# Altium PCB main_old.PcbDoc (part 8 of 15)
Units mil, origin at the board's own origin, x right, y up, seen from the top; angles counter-clockwise.
Board outline 8394.55 x 5164.44 mil, 7 copper layers (Top Layer 1, Layer 2, Layer 3, Unused, Layer 4_pow, Layer 5_gnd, Bottom 6+gnd), stack 46.112 mil thick; 363 components, 409 nets, 1750 pads, 991 vias.
Unrouted connection lines stored in the file: 1.
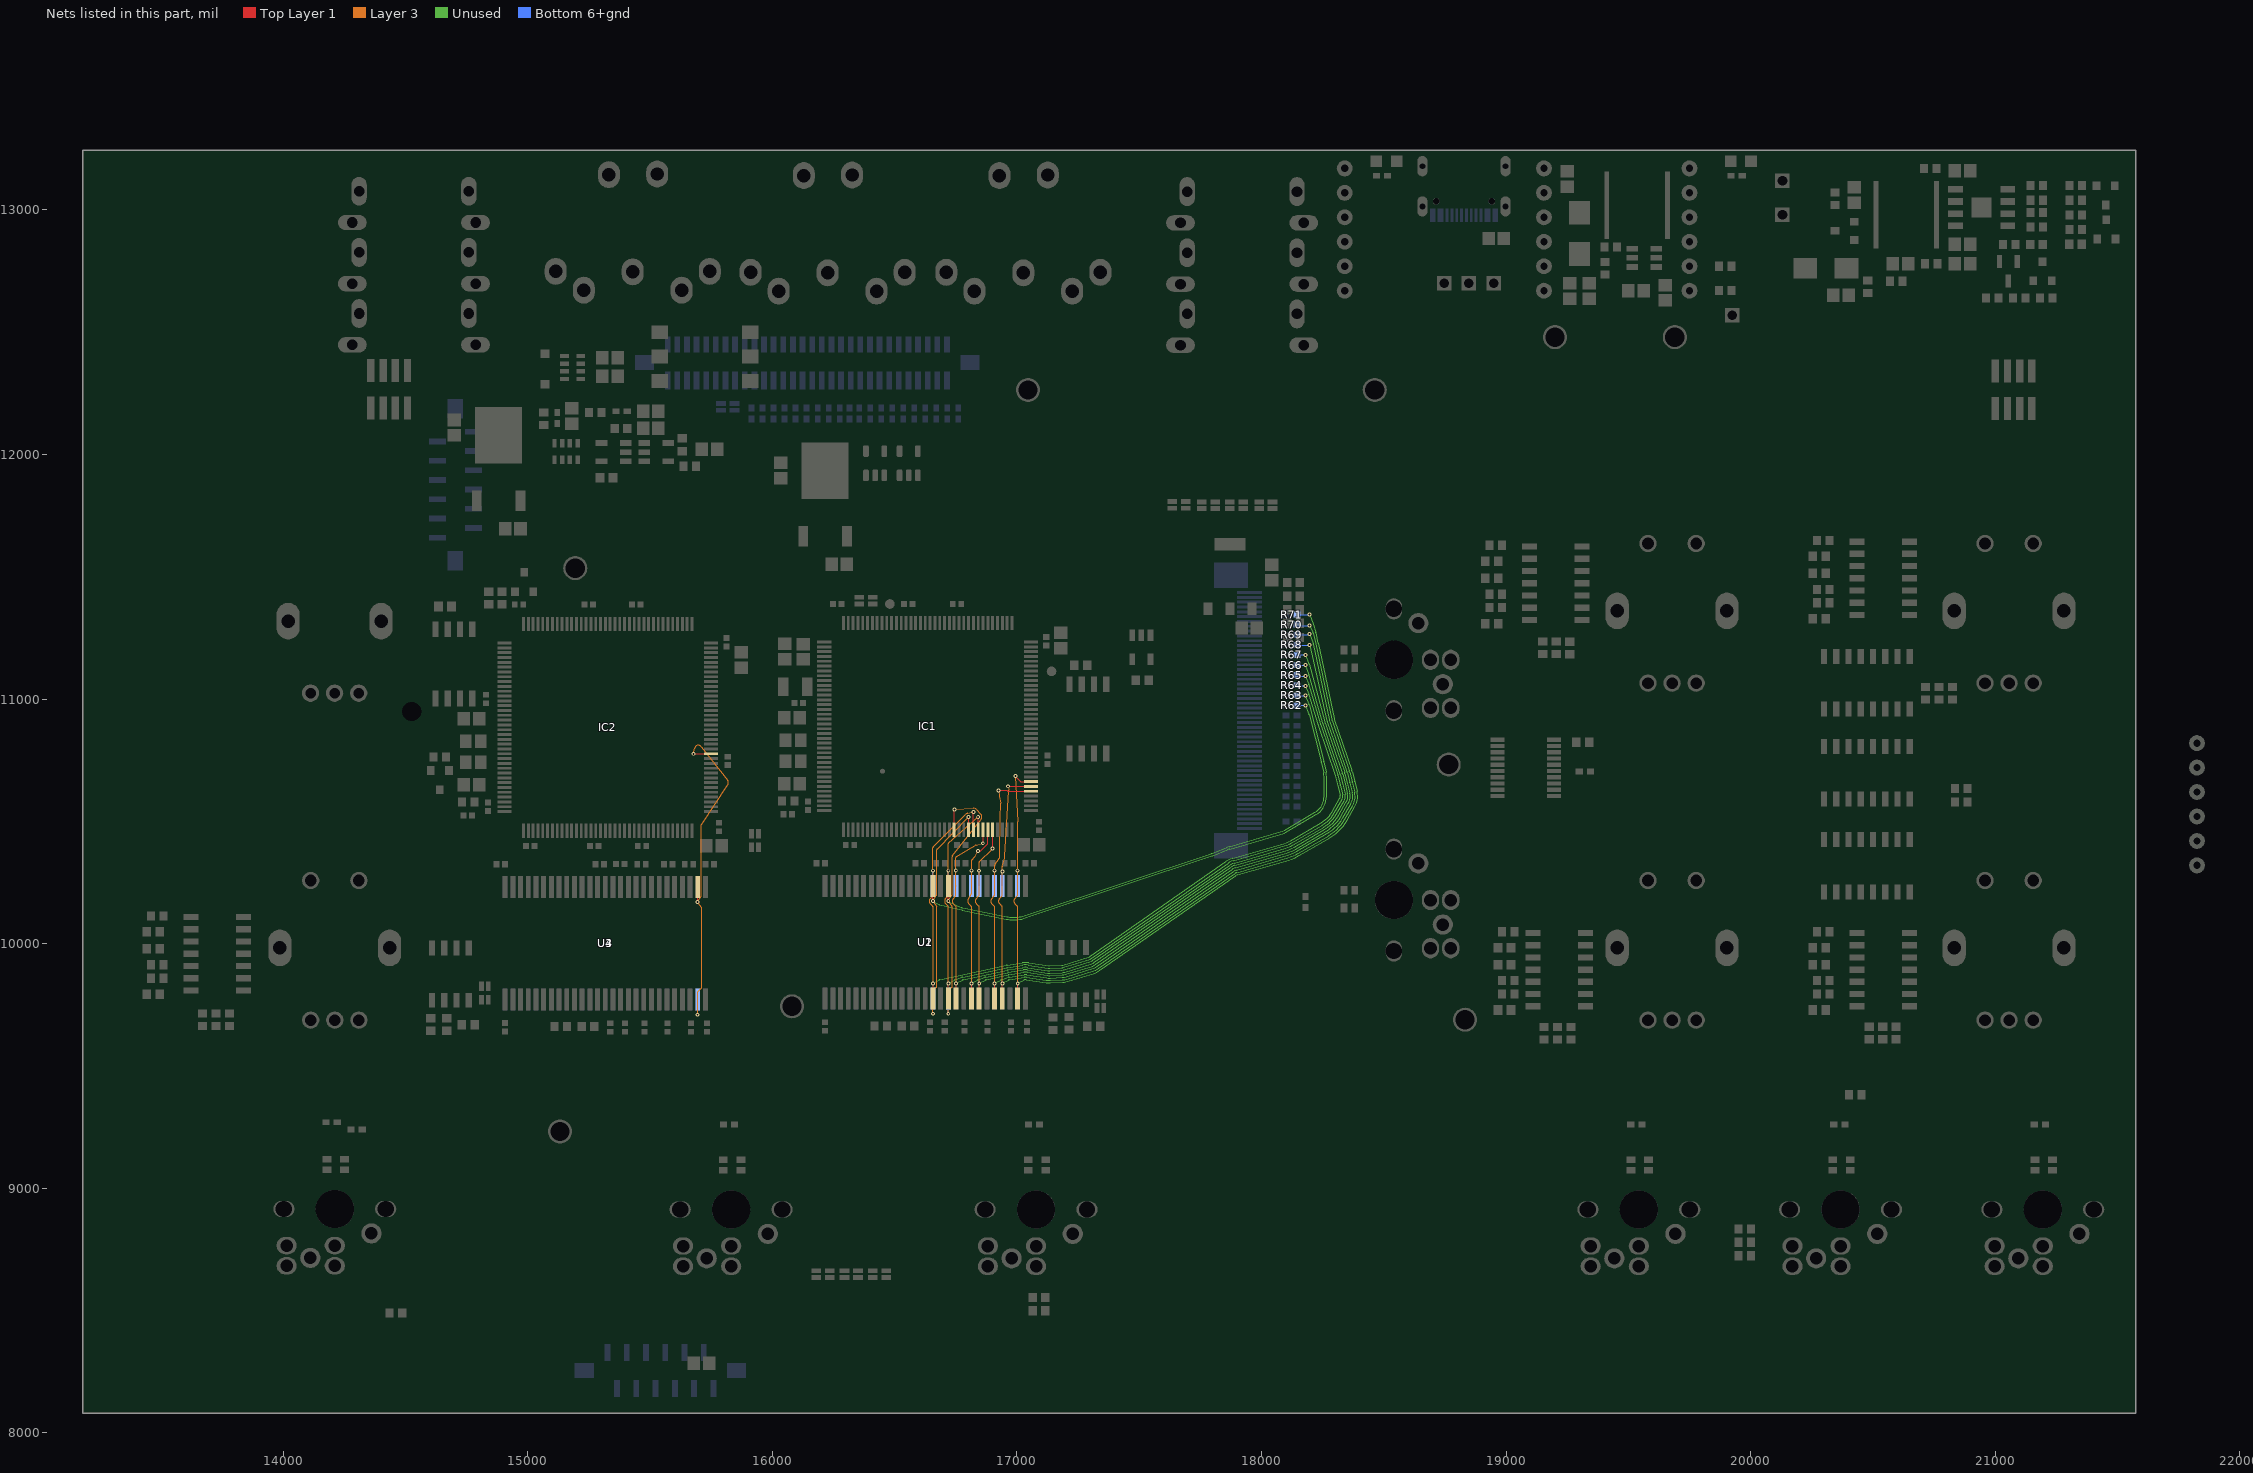
[diagram p11: the nets of this part, all layers, seen from the top]

## Via types
v1: diameter 15.75, hole 7.87, Top Layer 1 to Bottom 6+gnd, tented both sides, 923 vias
v2: diameter 27.56, hole 11.81, Top Layer 1 to Bottom 6+gnd, 45 vias
v3: diameter 23.62/23.62/23.62/23.62/23.62/23.62/23.62 (per signal layer), hole 12, Top Layer 1 to Bottom 6+gnd, tented top, 10 vias
v4: diameter 15.75, hole 7.87, Top Layer 1 to Bottom 6+gnd, 10 vias
v5: diameter 23.62/23.62/23.62/23.62/23.62/23.62/23.62 (per signal layer), hole 12, Top Layer 1 to Bottom 6+gnd, tented bottom, 3 vias

## Nets (pads, with @x,y where several pads share a name; then routed paths per layer and width w, separated by ;. In a path a pad name is that pad's centre, name@x,y a point inside that pad or via, vN(x,y) a via of type N, cw(c..) or ccw(c..) an arc to the next point about the centre after c; other vN are vias at no path point) (continued)
D6: IC1.60 R62.2 U1.11 U2.11 | length 3636.5
  Top Layer 1 w5: v1(16719.24,10174.13) 16719.24,10193.72 U1.11@16719.49,10236.22 ; IC1.60@16743.43,10465.91 16744.13,10466.61 16744.13,10547.95 v1(16745,10548.82)
  Unused w5: v1(16719.24,10174.13) 16720.82,10172.64 ccw(c16724.24,10176.28) 16721.93,10171.85 16743.62,10160.51 ccw(c16750.74,10174.13) 16744.97,10159.88 16773.04,10148.61 ccw(c16782.5,10172.15) 16777.38,10147.3 16958.03,10110.1 ccw(c16971.21,10174.13) 16971.21,10108.76 17002.71,10108.76 ccw(c17002.71,10174.13) 17024.23,10112.4 17059.75,10124.76 cw(c17068.11,10100.81) 17060.13,10124.89 17793.61,10367.97 ccw(c17770.06,10439.17) 17797.64,10369.43 17855.63,10392.32 cw(c17906.89,10262.58) 17868.12,10396.58 18076.76,10456.95 ccw(c18056.25,10529.09) 18094.04,10464.3 18218.41,10536.89 ccw(c18180.42,10601.98) 18255.79,10601.98 18255.79,10681.98 ccw(c18180.42,10681.98) 18253.9,10698.76 18244.18,10741.43 ccw(c18180.42,10726.98) 18243.74,10743.24 18194.2,10936.27 ccw(c18179.31,10932.45) 18193.59,10938.14 v1(18179.31,10974.03)
  Layer 3 w5: v1(16719.24,9713.5) 16719.24,9805.11 cw(c16724.24,9805.12) 16720.69,9808.63 16733.91,9821.89 ; v1(16745,10548.82) 16821.06,10553.92 ; 16733.91,9821.89 ccw(c16730.36,9825.42) 16735.36,9825.33 ; 16733.91,9821.89 ccw(c16730.36,9825.42) 16735.36,9825.33 ; 16733.91,9821.89 ccw(c16730.36,9825.42) 16735.36,9825.33 ; 16733.91,9821.89 ccw(c16730.36,9825.42) 16735.36,9825.33 ; 16733.91,9821.89 ccw(c16730.36,9825.42) 16735.36,9825.33 ; 16733.91,9821.89 ccw(c16730.36,9825.42) 16735.36,9825.33 ; 16733.91,9821.89 ccw(c16730.36,9825.42) 16735.36,9825.33 ; 16733.91,9821.89 ccw(c16730.36,9825.42) 16735.36,9825.33 ; 16733.91,9821.89 ccw(c16730.36,9825.42) 16735.36,9825.33 ; 16733.91,9821.89 ccw(c16730.36,9825.42) 16735.36,9825.33 ; 16733.91,9821.89 ccw(c16730.36,9825.42) 16735.36,9825.33 ; 16733.91,9821.89 ccw(c16730.36,9825.42) 16735.36,9825.33 ; 16733.91,9821.89 ccw(c16730.36,9825.42) 16735.36,9825.33 ; 16733.91,9821.89 ccw(c16730.36,9825.42) 16735.36,9825.33 ; 16733.91,9821.89 ccw(c16730.36,9825.42) 16735.36,9825.33 ; 16733.91,9821.89 ccw(c16730.36,9825.42) 16735.36,9825.33 ; 16734.32,10152.99 cw(c16730.36,10149.93) 16735.36,10150.02 ; 16734.32,10152.99 cw(c16730.36,10149.93) 16735.36,10150.02 ; 16734.32,10152.99 cw(c16730.36,10149.93) 16735.36,10150.02 ; 16734.32,10152.99 cw(c16730.36,10149.93) 16735.36,10150.02 ; 16734.32,10152.99 cw(c16730.36,10149.93) 16735.36,10150.02 ; 16734.32,10152.99 cw(c16730.36,10149.93) 16735.36,10150.02 ; 16734.32,10152.99 cw(c16730.36,10149.93) 16735.36,10150.02 ; 16734.32,10152.99 cw(c16730.36,10149.93) 16735.36,10150.02 ; 16734.32,10152.99 cw(c16730.36,10149.93) 16735.36,10150.02 ; 16734.32,10152.99 cw(c16730.36,10149.93) 16735.36,10150.02 ; 16734.32,10152.99 cw(c16730.36,10149.93) 16735.36,10150.02 ; 16734.32,10152.99 cw(c16730.36,10149.93) 16735.36,10150.02 ; 16734.32,10152.99 cw(c16730.36,10149.93) 16735.36,10150.02 ; 16734.32,10152.99 cw(c16730.36,10149.93) 16735.36,10150.02 ; 16734.32,10152.99 cw(c16730.36,10149.93) 16735.36,10150.02 ; 16734.32,10152.99 cw(c16730.36,10149.93) 16735.36,10150.02 ; 16734.32,10152.99 16720.29,10171.06 cw(c16724.24,10174.13) v1(16719.24,10174.13) 16719.24,10174.19 cw(c16724.24,10174.13) 16720.06,10176.88 16733.8,10197.79 ccw(c16729.62,10200.53) 16734.62,10200.44 16734.62,10356.36 ; 16734.62,10356.36 cw(c16739.62,10356.36) 16735.69,10359.46 ; 16734.62,10356.36 cw(c16739.62,10356.36) 16735.69,10359.46 ; 16734.62,10356.36 cw(c16739.62,10356.36) 16735.69,10359.46 ; 16734.62,10356.36 cw(c16739.62,10356.36) 16735.69,10359.46 ; 16734.62,10356.36 cw(c16739.62,10356.36) 16735.69,10359.46 ; 16734.62,10356.36 cw(c16739.62,10356.36) 16735.69,10359.46 ; 16734.62,10356.36 cw(c16739.62,10356.36) 16735.69,10359.46 ; 16734.62,10356.36 cw(c16739.62,10356.36) 16735.69,10359.46 ; 16734.62,10356.36 cw(c16739.62,10356.36) 16735.69,10359.46 ; 16734.62,10356.36 cw(c16739.62,10356.36) 16735.69,10359.46 ; 16734.62,10356.36 cw(c16739.62,10356.36) 16735.69,10359.46 ; 16734.62,10356.36 cw(c16739.62,10356.36) 16735.69,10359.46 ; 16734.62,10356.36 cw(c16739.62,10356.36) 16735.69,10359.46 ; 16734.62,10356.36 cw(c16739.62,10356.36) 16735.69,10359.46 ; 16734.62,10356.36 cw(c16739.62,10356.36) 16735.69,10359.46 ; 16734.62,10356.36 cw(c16739.62,10356.36) 16735.69,10359.46 ; 16735.36,9825.33 16735.36,10150.02 ; 16735.69,10359.46 16853.53,10509.07 ccw(c16841.46,10518.58) 16852.5,10529.28 16833.13,10549.28 ; 16821.06,10553.92 cw(c16822.09,10538.58) 16833.13,10549.28 ; 16821.06,10553.92 cw(c16822.09,10538.58) 16833.13,10549.28 ; 16821.06,10553.92 cw(c16822.09,10538.58) 16833.13,10549.28 ; 16821.06,10553.92 cw(c16822.09,10538.58) 16833.13,10549.28 ; 16821.06,10553.92 cw(c16822.09,10538.58) 16833.13,10549.28 ; 16821.06,10553.92 cw(c16822.09,10538.58) 16833.13,10549.28 ; 16821.06,10553.92 cw(c16822.09,10538.58) 16833.13,10549.28 ; 16821.06,10553.92 cw(c16822.09,10538.58) 16833.13,10549.28 ; 16821.06,10553.92 cw(c16822.09,10538.58) 16833.13,10549.28 ; 16821.06,10553.92 cw(c16822.09,10538.58) 16833.13,10549.28 ; 16821.06,10553.92 cw(c16822.09,10538.58) 16833.13,10549.28 ; 16821.06,10553.92 cw(c16822.09,10538.58) 16833.13,10549.28 ; 16821.06,10553.92 cw(c16822.09,10538.58) 16833.13,10549.28 ; 16821.06,10553.92 cw(c16822.09,10538.58) 16833.13,10549.28 ; 16821.06,10553.92 cw(c16822.09,10538.58) 16833.13,10549.28 ; 16821.06,10553.92 cw(c16822.09,10538.58) 16833.13,10549.28
  Bottom 6+gnd w5: v1@16719.49,9713.75 U2.11@16719.49,9775.59 ; R62.2@18145.28,10974.03 v1(18179.31,10974.03)
D7: IC1.63 R63.2 U1.13 U2.13 | length 3429.1
  Top Layer 1 w5: v1(16656.25,10174.13) 16656.25,10193.72 U1.13@16656.5,10236.22 ; IC1.63@16802.32,10466.06 v1@16802.32,10518.35
  Unused w5: v1(16656.25,10174.13) 16657.74,10172.65 ccw(c16661.25,10176.21) 16658.95,10171.77 16680.7,10160.47 ccw(c16687.75,10174.13) 16684.19,10159.18 16774.38,10137.72 16775.32,10137.51 ccw(c16777.38,10147.3) 16775.41,10137.5 16956.03,10100.3 ccw(c16971.21,10174.13) 16971.21,10098.76 17002.71,10098.76 ccw(c17002.71,10174.13) 17027.48,10102.95 17063.03,10115.32 cw(c17068.11,10100.81) 17063.28,10115.4 17796.8,10358.49 ccw(c17770.06,10439.17) 17801.26,10360.11 17859.35,10383.04 cw(c17906.89,10262.58) 17870.92,10386.98 18079.54,10447.34 ccw(c18056.25,10529.09) 18099.08,10455.67 18223.45,10528.25 ccw(c18180.42,10601.98) 18265.79,10601.98 18265.79,10681.98 ccw(c18180.42,10681.98) 18263.65,10700.98 18253.92,10743.66 ; v1(18179.31,11014.03) 18193.5,10979.94 cw(c18179.31,10974.03) 18194.21,10977.83 18253.42,10745.76 cw(c18180.42,10726.98) 18253.93,10743.66
  Layer 3 w5: v1(16656.25,9713.5) 16656.25,9805.11 cw(c16661.25,9805.12) 16657.7,9808.63 16670.66,9821.64 ; v1(16802.09,10518.58) 16673.05,10386.87 ; v1@16656.25,10174.13 ccw(c16661.25,10174.13) v1@16657.28,10171.1 ; v1@16656.25,10174.13 ccw(c16661.25,10174.13) v1@16657.28,10171.1 ; v1@16656.25,10174.13 ccw(c16661.25,10174.13) v1@16657.28,10171.1 ; v1@16656.25,10174.13 ccw(c16661.25,10174.13) v1@16657.28,10171.1 ; v1@16656.25,10174.13 ccw(c16661.25,10174.13) v1@16657.28,10171.09 ; v1(16656.25,10174.13) 16656.25,10174.19 cw(c16661.25,10174.13) 16657.07,10176.88 16670.8,10197.79 ccw(c16666.62,10200.53) 16671.62,10200.44 16671.62,10383.37 ; v1@16657.28,10171.09 16671.07,10153.24 ; 16670.66,9821.64 ccw(c16667.11,9825.17) 16672.11,9825.08 ; 16670.66,9821.64 ccw(c16667.11,9825.17) 16672.11,9825.08 ; 16670.66,9821.64 ccw(c16667.11,9825.17) 16672.11,9825.08 ; 16670.66,9821.64 ccw(c16667.11,9825.17) 16672.11,9825.08 ; 16670.66,9821.64 ccw(c16667.11,9825.17) 16672.11,9825.08 ; 16670.66,9821.64 ccw(c16667.11,9825.17) 16672.11,9825.08 ; 16670.66,9821.64 ccw(c16667.11,9825.17) 16672.11,9825.08 ; 16670.66,9821.64 ccw(c16667.11,9825.17) 16672.11,9825.08 ; 16670.66,9821.64 ccw(c16667.11,9825.17) 16672.11,9825.08 ; 16670.66,9821.64 ccw(c16667.11,9825.17) 16672.11,9825.08 ; 16670.66,9821.64 ccw(c16667.11,9825.17) 16672.11,9825.08 ; 16670.66,9821.64 ccw(c16667.11,9825.17) 16672.11,9825.08 ; 16670.66,9821.64 ccw(c16667.11,9825.17) 16672.11,9825.08 ; 16670.66,9821.64 ccw(c16667.11,9825.17) 16672.11,9825.08 ; 16670.66,9821.64 ccw(c16667.11,9825.17) 16672.11,9825.08 ; 16670.66,9821.64 ccw(c16667.11,9825.17) 16672.11,9825.08 ; 16671.07,10153.24 cw(c16667.11,10150.19) 16672.11,10150.28 ; 16671.07,10153.24 cw(c16667.11,10150.19) 16672.11,10150.28 ; 16671.07,10153.24 cw(c16667.11,10150.19) 16672.11,10150.28 ; 16671.07,10153.24 cw(c16667.11,10150.19) 16672.11,10150.28 ; 16671.07,10153.24 cw(c16667.11,10150.19) 16672.11,10150.28 ; 16671.07,10153.24 cw(c16667.11,10150.19) 16672.11,10150.28 ; 16671.07,10153.24 cw(c16667.11,10150.19) 16672.11,10150.28 ; 16671.07,10153.24 cw(c16667.11,10150.19) 16672.11,10150.28 ; 16671.07,10153.24 cw(c16667.11,10150.19) 16672.11,10150.28 ; 16671.07,10153.24 cw(c16667.11,10150.19) 16672.11,10150.28 ; 16671.07,10153.24 cw(c16667.11,10150.19) 16672.11,10150.28 ; 16671.07,10153.24 cw(c16667.11,10150.19) 16672.11,10150.28 ; 16671.07,10153.24 cw(c16667.11,10150.19) 16672.11,10150.28 ; 16671.07,10153.24 cw(c16667.11,10150.19) 16672.11,10150.28 ; 16671.07,10153.24 cw(c16667.11,10150.19) 16672.11,10150.28 ; 16671.07,10153.24 cw(c16667.11,10150.19) 16672.11,10150.28 ; 16671.62,10383.37 cw(c16676.63,10383.37) 16673.04,10386.86 ; 16671.62,10383.37 cw(c16676.63,10383.37) 16673.04,10386.86 ; 16671.62,10383.37 cw(c16676.63,10383.37) 16673.05,10386.87 ; 16671.62,10383.37 cw(c16676.63,10383.37) 16673.05,10386.86 ; 16671.62,10383.37 cw(c16676.63,10383.37) 16673.04,10386.86 ; 16671.62,10383.37 cw(c16676.63,10383.37) 16673.04,10386.86 ; 16671.62,10383.37 cw(c16676.63,10383.37) 16673.04,10386.86 ; 16671.62,10383.37 cw(c16676.63,10383.37) 16673.04,10386.86 ; 16671.62,10383.37 cw(c16676.63,10383.37) 16673.04,10386.85 ; 16671.62,10383.37 cw(c16676.63,10383.37) 16673.04,10386.85 ; 16671.62,10383.37 cw(c16676.63,10383.37) 16673.04,10386.85 ; 16671.62,10383.37 cw(c16676.63,10383.37) 16673.04,10386.85 ; 16671.62,10383.37 cw(c16676.63,10383.37) 16673.04,10386.85 ; 16671.62,10383.37 cw(c16676.63,10383.37) 16673.04,10386.85 ; 16671.62,10383.37 cw(c16676.63,10383.37) 16673.04,10386.85 ; 16671.62,10383.37 cw(c16676.63,10383.37) 16673.04,10386.85 ; 16672.11,9825.08 16672.11,10150.28
  Bottom 6+gnd w5: v1@16656.5,9713.75 U2.13@16656.5,9775.59 ; R63.2@18144.17,11014.23 18179.1,11014.23 v1(18179.31,11014.03)
D8: IC1.64 R64.2 U1.42 U2.42 | length 3696.2
  Top Layer 1 w5: U1.42@16656.5,9775.59 16656.74,9818.09 v1(16656.74,9837.68) ; IC1.64@16822.17,10465.9 v1@16822.17,10538.5
  Unused w5: v1(16656.74,9837.68) 16658.21,9839.14 cw(c16661.74,9835.6) 16659.44,9840.04 16681.13,9851.31 cw(c16688.24,9837.68) 16684.98,9852.7 16955.77,9911.35 cw(c16971.7,9837.68) 16959.74,9912.09 17021.14,9921.97 cw(c17034.69,9837.68) 17047.87,9922.03 17129.61,9909.48 ccw(c17131.96,9924.67) 17132.74,9909.31 17182.9,9911.85 ccw(c17182.09,9927.2) 17186.64,9912.52 17297.1,9946.79 ccw(c17294.88,9953.96) 17299.17,9947.81 17855.69,10335.99 cw(c17906.89,10262.58) 17882.02,10348.55 18090.73,10408.94 ccw(c18056.25,10529.09) 18119.13,10421.05 18243.61,10493.7 ccw(c18180.42,10601.98) 18289.14,10539.56 18320.73,10594.57 ccw(c18307.4,10602.23) 18322.34,10605.83 18312.6,10646.2 ccw(c18297.66,10642.59) 18312.53,10646.47 18302.33,10685.68 ccw(c18287.45,10681.8) 18301.92,10686.99 18231.71,10892.03 cw(c18338.58,10928.53) 18230.33,10896.35 18194.04,11018.41 ccw(c18179.31,11014.03) 18193.5,11019.94 v1(18179.31,11054.03)
  Layer 3 w5: v1(16656.74,9837.68) 16656.74,10149.87 ; v1(16822.09,10538.58) 16798.87,10533.62 ; 16655.28,10153.31 cw(c16651.74,10149.78) 16656.74,10149.87 ; 16655.28,10153.31 cw(c16651.74,10149.78) 16656.74,10149.87 ; 16655.28,10153.31 cw(c16651.74,10149.78) 16656.74,10149.87 ; 16655.28,10153.31 cw(c16651.74,10149.78) 16656.74,10149.87 ; 16655.28,10153.31 cw(c16651.74,10149.78) 16656.74,10149.87 ; 16655.28,10153.31 cw(c16651.74,10149.78) 16656.74,10149.87 ; 16655.28,10153.31 cw(c16651.74,10149.78) 16656.74,10149.87 ; 16655.28,10153.31 cw(c16651.74,10149.78) 16656.74,10149.87 ; 16655.28,10153.31 cw(c16651.74,10149.78) 16656.74,10149.87 ; 16655.28,10153.31 cw(c16651.74,10149.78) 16656.74,10149.87 ; 16655.28,10153.31 cw(c16651.74,10149.78) 16656.74,10149.87 ; 16655.28,10153.31 cw(c16651.74,10149.78) 16656.74,10149.87 ; 16655.28,10153.31 cw(c16651.74,10149.78) 16656.74,10149.87 ; 16655.28,10153.31 cw(c16651.74,10149.78) 16656.74,10149.87 ; 16655.28,10153.31 cw(c16651.74,10149.78) 16656.74,10149.87 ; 16655.28,10153.31 cw(c16651.74,10149.78) 16656.74,10149.87 ; 16655.28,10153.31 16645.36,10163.28 cw(c16656.25,10174.13) 16644.73,10184.31 16655.49,10196.48 ; 16655.49,10196.48 ccw(c16651.74,10199.79) 16656.74,10199.7 ; 16655.49,10196.48 ccw(c16651.74,10199.79) 16656.74,10199.7 ; 16655.49,10196.48 ccw(c16651.74,10199.79) 16656.74,10199.7 ; 16655.49,10196.48 ccw(c16651.74,10199.79) 16656.74,10199.7 ; 16655.49,10196.48 ccw(c16651.74,10199.79) 16656.74,10199.7 ; 16655.49,10196.48 ccw(c16651.74,10199.79) 16656.74,10199.7 ; 16655.49,10196.48 ccw(c16651.74,10199.79) 16656.74,10199.7 ; 16655.49,10196.48 ccw(c16651.74,10199.79) 16656.74,10199.7 ; 16655.49,10196.48 ccw(c16651.74,10199.79) 16656.74,10199.7 ; 16655.49,10196.48 ccw(c16651.74,10199.79) 16656.74,10199.7 ; 16655.49,10196.48 ccw(c16651.74,10199.79) 16656.74,10199.7 ; 16655.49,10196.48 ccw(c16651.74,10199.79) 16656.74,10199.7 ; 16655.49,10196.48 ccw(c16651.74,10199.79) 16656.74,10199.7 ; 16655.49,10196.48 ccw(c16651.74,10199.79) 16656.74,10199.7 ; 16655.49,10196.48 ccw(c16651.74,10199.79) 16656.74,10199.7 ; 16655.49,10196.48 ccw(c16651.74,10199.79) 16656.74,10199.7 ; 16656.25,10392.42 cw(c16661.25,10392.42) 16657.7,10395.93 ; 16656.25,10392.42 cw(c16661.25,10392.42) 16657.7,10395.93 ; 16656.25,10392.42 cw(c16661.25,10392.42) 16657.7,10395.93 ; 16656.25,10392.42 cw(c16661.25,10392.42) 16657.7,10395.93 ; 16656.25,10392.42 cw(c16661.25,10392.42) 16657.7,10395.93 ; 16656.25,10392.42 cw(c16661.25,10392.42) 16657.7,10395.93 ; 16656.25,10392.42 cw(c16661.25,10392.42) 16657.7,10395.93 ; 16656.25,10392.42 cw(c16661.25,10392.42) 16657.7,10395.93 ; 16656.25,10392.42 cw(c16661.25,10392.42) 16657.7,10395.93 ; 16656.25,10392.42 cw(c16661.25,10392.42) 16657.7,10395.93 ; 16656.25,10392.42 cw(c16661.25,10392.42) 16657.7,10395.93 ; 16656.25,10392.42 cw(c16661.25,10392.42) 16657.7,10395.93 ; 16656.25,10392.42 cw(c16661.25,10392.42) 16657.7,10395.93 ; 16656.25,10392.42 cw(c16661.25,10392.42) 16657.7,10395.93 ; 16656.25,10392.42 cw(c16661.25,10392.42) 16657.7,10395.93 ; 16656.25,10392.42 cw(c16661.25,10392.42) 16657.7,10395.93 ; 16656.25,10392.42 v1(16656.25,10298.31) 16656.74,10297.82 16656.74,10199.7 ; 16657.7,10395.93 16791.23,10529.47 ; 16791.23,10529.47 cw(c16802.09,10518.58) 16798.87,10533.62 ; 16791.23,10529.47 cw(c16802.09,10518.58) 16798.87,10533.62 ; 16791.23,10529.47 cw(c16802.09,10518.58) 16798.87,10533.62 ; 16791.23,10529.47 cw(c16802.09,10518.58) 16798.87,10533.62 ; 16791.23,10529.47 cw(c16802.09,10518.58) 16798.87,10533.62 ; 16791.23,10529.47 cw(c16802.09,10518.58) 16798.87,10533.62 ; 16791.23,10529.47 cw(c16802.09,10518.58) 16798.87,10533.62 ; 16791.23,10529.47 cw(c16802.09,10518.58) 16798.87,10533.62 ; 16791.23,10529.47 cw(c16802.09,10518.58) 16798.87,10533.62 ; 16791.23,10529.47 cw(c16802.09,10518.58) 16798.87,10533.62 ; 16791.23,10529.47 cw(c16802.09,10518.58) 16798.87,10533.62 ; 16791.23,10529.47 cw(c16802.09,10518.58) 16798.87,10533.62 ; 16791.23,10529.47 cw(c16802.09,10518.58) 16798.87,10533.62 ; 16791.23,10529.47 cw(c16802.09,10518.58) 16798.87,10533.62 ; 16791.23,10529.47 cw(c16802.09,10518.58) 16798.87,10533.62 ; 16791.23,10529.47 cw(c16802.09,10518.58) 16798.87,10533.62
  Bottom 6+gnd w5: U2.42@16656.5,10236.22 v1@16656.5,10298.06 ; R64.2@18144.17,11055.55 18177.79,11055.55 v1(18179.31,11054.03)
D9: IC1.65 R65.2 U1.44 U2.44 | length 3497.6
  Top Layer 1 w5: U1.44@16719.49,9775.59 16719.73,9818.09 v1(16719.73,9837.68) ; IC1.65@16841.69,10466.06 v1@16841.69,10518.35
  Unused w5: v1(16719.73,9837.68) 16721.2,9839.14 cw(c16724.73,9835.6) 16722.43,9840.04 16744.12,9851.31 cw(c16751.23,9837.68) 16746.35,9852.25 16774.69,9861.75 cw(c16782.72,9837.68) 16777.4,9862.48 16957.92,9901.58 cw(c16971.7,9837.68) 16961.31,9902.22 17022.7,9912.09 cw(c17034.69,9837.68) 17046.33,9912.15 ; 17046.33,9912.15 17128.02,9899.6 ccw(c17131.96,9924.67) 17133.28,9899.33 17183.36,9901.86 ccw(c17182.09,9927.2) 17189.57,9902.96 17300.07,9937.24 ccw(c17294.88,9953.96) 17304.89,9939.6 17861.33,10327.73 cw(c17906.89,10262.58) 17884.85,10338.96 18093.54,10399.34 ccw(c18056.25,10529.09) 18124.17,10412.42 18248.65,10485.06 ccw(c18180.42,10601.98) 18297.82,10534.58 18329.4,10589.59 ccw(c18307.4,10602.23) 18332.07,10608.18 18322.32,10648.55 ccw(c18297.66,10642.59) 18322.21,10648.99 18312,10688.19 ccw(c18287.45,10681.8) 18311.38,10690.23 18241.18,10895.24 cw(c18338.58,10928.53) 18239.67,10900.04 18194.08,11058.29 ccw(c18179.31,11054.03) 18193.5,11059.94 v1(18179.31,11094.03)
  Layer 3 w5: v1(16719.73,9837.68) 16719.73,10149.87 ; v1(16841.46,10518.58) 16720.93,10412.23 ; 16718.28,10153.31 cw(c16714.73,10149.78) 16719.73,10149.87 ; 16718.28,10153.31 cw(c16714.73,10149.78) 16719.73,10149.87 ; 16718.28,10153.31 cw(c16714.73,10149.78) 16719.73,10149.87 ; 16718.28,10153.31 cw(c16714.73,10149.78) 16719.73,10149.87 ; 16718.28,10153.31 cw(c16714.73,10149.78) 16719.73,10149.87 ; 16718.28,10153.31 cw(c16714.73,10149.78) 16719.73,10149.87 ; 16718.28,10153.31 cw(c16714.73,10149.78) 16719.73,10149.87 ; 16718.28,10153.31 cw(c16714.73,10149.78) 16719.73,10149.87 ; 16718.28,10153.31 cw(c16714.73,10149.78) 16719.73,10149.87 ; 16718.28,10153.31 cw(c16714.73,10149.78) 16719.73,10149.87 ; 16718.28,10153.31 cw(c16714.73,10149.78) 16719.73,10149.87 ; 16718.28,10153.31 cw(c16714.73,10149.78) 16719.73,10149.87 ; 16718.28,10153.31 cw(c16714.73,10149.78) 16719.73,10149.87 ; 16718.28,10153.31 cw(c16714.73,10149.78) 16719.73,10149.87 ; 16718.28,10153.31 cw(c16714.73,10149.78) 16719.73,10149.87 ; 16718.28,10153.31 cw(c16714.73,10149.78) 16719.73,10149.87 ; 16718.28,10153.31 16708.35,10163.28 cw(c16719.24,10174.13) 16707.72,10184.31 16718.48,10196.48 ; 16718.48,10196.48 ccw(c16714.73,10199.79) 16719.73,10199.7 ; 16718.48,10196.48 ccw(c16714.73,10199.79) 16719.73,10199.7 ; 16718.48,10196.48 ccw(c16714.73,10199.79) 16719.73,10199.7 ; 16718.48,10196.48 ccw(c16714.73,10199.79) 16719.73,10199.7 ; 16718.48,10196.48 ccw(c16714.73,10199.79) 16719.73,10199.7 ; 16718.48,10196.48 ccw(c16714.73,10199.79) 16719.73,10199.7 ; 16718.48,10196.48 ccw(c16714.73,10199.79) 16719.73,10199.7 ; 16718.48,10196.48 ccw(c16714.73,10199.79) 16719.73,10199.7 ; 16718.48,10196.48 ccw(c16714.73,10199.79) 16719.73,10199.7 ; 16718.48,10196.48 ccw(c16714.73,10199.79) 16719.73,10199.7 ; 16718.48,10196.48 ccw(c16714.73,10199.79) 16719.73,10199.7 ; 16718.48,10196.48 ccw(c16714.73,10199.79) 16719.73,10199.7 ; 16718.48,10196.48 ccw(c16714.73,10199.79) 16719.73,10199.7 ; 16718.48,10196.48 ccw(c16714.73,10199.79) 16719.73,10199.7 ; 16718.48,10196.48 ccw(c16714.73,10199.79) 16719.73,10199.7 ; 16718.48,10196.48 ccw(c16714.73,10199.79) 16719.73,10199.7 ; 16719.24,10408.49 cw(c16724.24,10408.49) 16720.93,10412.24 ; 16719.24,10408.49 cw(c16724.24,10408.49) 16720.93,10412.24 ; 16719.24,10408.49 cw(c16724.24,10408.49) 16720.93,10412.24 ; 16719.24,10408.49 cw(c16724.24,10408.49) 16720.93,10412.24 ; 16719.24,10408.49 cw(c16724.24,10408.49) 16720.93,10412.24 ; 16719.24,10408.49 cw(c16724.24,10408.49) 16720.93,10412.24 ; 16719.24,10408.49 cw(c16724.24,10408.49) 16720.93,10412.24 ; 16719.24,10408.49 cw(c16724.24,10408.49) 16720.93,10412.24 ; 16719.24,10408.49 cw(c16724.24,10408.49) 16720.93,10412.24 ; 16719.24,10408.49 cw(c16724.24,10408.49) 16720.93,10412.24 ; 16719.24,10408.49 cw(c16724.24,10408.49) 16720.93,10412.24 ; 16719.24,10408.49 cw(c16724.24,10408.49) 16720.93,10412.24 ; 16719.24,10408.49 cw(c16724.24,10408.49) 16720.93,10412.24 ; 16719.24,10408.49 cw(c16724.24,10408.49) 16720.93,10412.24 ; 16719.24,10408.49 cw(c16724.24,10408.49) 16720.93,10412.24 ; 16719.24,10408.49 cw(c16724.24,10408.49) 16720.93,10412.24 ; 16719.24,10408.49 v1(16719.24,10298.31) 16719.73,10297.82 16719.73,10199.7
  Bottom 6+gnd w5: U2.44@16719.49,10236.22 v1@16719.49,10298.06 ; R65.2@18144.17,11096.87 18145,11096.69 18157.54,11094.03 v1(18179.31,11094.03)
D10: IC1.66 R66.2 U1.45 U2.45 | length 3395.8
  Top Layer 1 w5: U1.45@16750.98,9775.59 16751.23,9818.09 v1(16751.23,9837.68) ; v1(16860.36,10410.52) 16861.27,10411.44 IC1.66@16861.27,10466.15
  Unused w5: v1(16751.23,9837.68) 16752.7,9839.14 cw(c16756.23,9835.6) 16753.92,9840.04 16775.62,9851.31 cw(c16782.72,9837.68) 16779.47,9852.7 16959.98,9891.8 cw(c16971.7,9837.68) 16962.89,9892.35 17024.29,9902.22 cw(c17034.69,9837.68) 17044.53,9902.31 17126.5,9889.72 ccw(c17131.96,9924.67) 17133.79,9889.34 17183.87,9891.88 ccw(c17182.09,9927.2) 17192.58,9893.42 17303.03,9927.69 ccw(c17294.88,9953.96) 17310.63,9931.41 17867.03,10319.51 cw(c17906.89,10262.58) 17887.58,10329.34 18096.36,10389.75 ccw(c18056.25,10529.09) 18129.21,10403.78 18253.69,10476.43 ccw(c18180.42,10601.98) 18306.49,10529.6 18338.08,10584.61 ccw(c18307.4,10602.23) 18341.79,10610.53 18332.04,10650.89 ccw(c18297.66,10642.59) 18331.9,10651.46 18321.69,10690.67 ccw(c18287.45,10681.8) 18320.85,10693.46 18250.63,10898.5 cw(c18338.58,10928.53) 18249.14,10903.28 18194.1,11098.21 ccw(c18179.31,11094.03) 18193.76,11099.28 v1(18179.31,11139.03)
  Layer 3 w5: v1(16751.23,9837.68) 16751.23,10149.87 ; v1(16860.36,10410.52) 16833.45,10403.33 ccw(c16840,10378.82) 16827.33,10400.81 16802.49,10386.49 ccw(c16815.15,10364.5) 16801.96,10386.18 16752.4,10356.02 ; 16749.77,10153.31 cw(c16746.23,10149.78) 16751.23,10149.87 ; 16749.77,10153.31 cw(c16746.23,10149.78) 16751.23,10149.87 ; 16749.77,10153.31 cw(c16746.23,10149.78) 16751.23,10149.87 ; 16749.77,10153.31 cw(c16746.23,10149.78) 16751.23,10149.87 ; 16749.77,10153.31 cw(c16746.23,10149.78) 16751.23,10149.87 ; 16749.77,10153.31 cw(c16746.23,10149.78) 16751.23,10149.87 ; 16749.77,10153.31 cw(c16746.23,10149.78) 16751.23,10149.87 ; 16749.77,10153.31 cw(c16746.23,10149.78) 16751.23,10149.87 ; 16749.77,10153.31 cw(c16746.23,10149.78) 16751.23,10149.87 ; 16749.77,10153.31 cw(c16746.23,10149.78) 16751.23,10149.87 ; 16749.77,10153.31 cw(c16746.23,10149.78) 16751.23,10149.87 ; 16749.77,10153.31 cw(c16746.23,10149.78) 16751.23,10149.87 ; 16749.77,10153.31 cw(c16746.23,10149.78) 16751.23,10149.87 ; 16749.77,10153.31 cw(c16746.23,10149.78) 16751.23,10149.87 ; 16749.77,10153.31 cw(c16746.23,10149.78) 16751.23,10149.87 ; 16749.77,10153.31 cw(c16746.23,10149.78) 16751.23,10149.87 ; 16749.77,10153.31 16739.84,10163.28 cw(c16750.74,10174.13) 16739.14,10184.22 16748.77,10195.28 ccw(c16745,10198.56) 16750,10198.47 v1(16750,10298.82) 16750,10351.75 ; 16750,10351.75 cw(c16755,10351.75) 16752.4,10356.02 ; 16750,10351.75 cw(c16755,10351.75) 16752.4,10356.02 ; 16750,10351.75 cw(c16755,10351.75) 16752.4,10356.02 ; 16750,10351.75 cw(c16755,10351.75) 16752.4,10356.02 ; 16750,10351.75 cw(c16755,10351.75) 16752.4,10356.02 ; 16750,10351.75 cw(c16755,10351.75) 16752.4,10356.02 ; 16750,10351.75 cw(c16755,10351.75) 16752.4,10356.02 ; 16750,10351.75 cw(c16755,10351.75) 16752.4,10356.02 ; 16750,10351.75 cw(c16755,10351.75) 16752.4,10356.02 ; 16750,10351.75 cw(c16755,10351.75) 16752.4,10356.02 ; 16750,10351.75 cw(c16755,10351.75) 16752.4,10356.02 ; 16750,10351.75 cw(c16755,10351.75) 16752.4,10356.02 ; 16750,10351.75 cw(c16755,10351.75) 16752.4,10356.02 ; 16750,10351.75 cw(c16755,10351.75) 16752.4,10356.02 ; 16750,10351.75 cw(c16755,10351.75) 16752.4,10356.02 ; 16750,10351.75 cw(c16755,10351.75) 16752.4,10356.02
  Bottom 6+gnd w5: v1(16750,10298.82) 16750,10237.2 U2.45@16750.98,10236.22 ; R66.2@18144.17,11138.18 18145.28,11138.18 18178.46,11138.18 v1(18179.31,11139.03)
D11: IC1.67 R67.2 U1.47 U2.47 | length 3725.4
  Top Layer 1 w5: U1.47@16813.98,9775.59 16814.22,9818.09 v1(16814.22,9837.68) ; v1(16840,10378.82) 16850.4,10378.82 16881.06,10409.48 IC1.67@16881.06,10466.06
  Unused w5: v1(16814.22,9837.68) 16815.69,9839.14 cw(c16819.22,9835.6) 16816.92,9840.04 16838.61,9851.31 cw(c16845.72,9837.68) 16840.84,9852.26 16869.16,9861.74 cw(c16877.21,9837.68) 16871.89,9862.48 16962.1,9882.02 cw(c16971.7,9837.68) 16964.5,9882.48 17025.87,9892.34 cw(c17034.69,9837.68) 17042.98,9892.43 17124.97,9879.84 ccw(c17131.96,9924.67) 17134.25,9879.35 17184.34,9881.89 ccw(c17182.09,9927.2) 17195.46,9883.85 17305.99,9918.14 ccw(c17294.88,9953.96) 17316.28,9923.16 17872.72,10311.29 cw(c17906.89,10262.58) 17890.36,10319.73 18099.16,10380.15 ccw(c18056.25,10529.09) 18134.23,10395.13 18258.73,10467.79 ccw(c18180.42,10601.98) 18315.18,10524.65 18346.73,10579.6 ccw(c18307.4,10602.23) 18351.51,10612.87 18341.76,10653.24 ccw(c18297.66,10642.59) 18341.58,10653.98 18331.37,10693.19 ccw(c18287.45,10681.8) 18330.31,10696.69 18260.11,10901.68 cw(c18338.58,10928.53) 18258.57,10906.72 18194.14,11143.07 ccw(c18179.31,11139.03) 18193.59,11144.72 v1(18179.31,11180.61)
  Layer 3 w5: v1(16814.22,9837.68) 16814.22,10149.87 ; v1(16840,10378.82) 16828.78,10357.37 ; 16800.75,10182.37 ccw(c16813.73,10174.13) 16802.88,10163.24 ; 16800.75,10182.37 ccw(c16813.73,10174.13) 16802.88,10163.24 ; 16800.75,10182.37 ccw(c16813.73,10174.13) 16802.88,10163.24 ; 16800.75,10182.37 ccw(c16813.73,10174.13) 16802.88,10163.24 ; 16800.75,10182.37 ccw(c16813.73,10174.13) 16802.88,10163.24 ; 16800.75,10182.37 ccw(c16813.73,10174.13) 16802.88,10163.24 ; 16800.75,10182.37 ccw(c16813.73,10174.13) 16802.88,10163.24 ; 16800.75,10182.37 ccw(c16813.73,10174.13) 16802.88,10163.24 ; 16800.75,10182.37 ccw(c16813.73,10174.13) 16802.88,10163.24 ; 16800.75,10182.37 ccw(c16813.73,10174.13) 16802.88,10163.24 ; 16800.75,10182.37 ccw(c16813.73,10174.13) 16802.88,10163.24 ; 16800.75,10182.37 ccw(c16813.73,10174.13) 16802.88,10163.24 ; 16800.75,10182.37 ccw(c16813.73,10174.13) 16802.88,10163.24 ; 16800.75,10182.37 ccw(c16813.73,10174.13) 16802.88,10163.24 ; 16800.75,10182.37 ccw(c16813.73,10174.13) 16802.88,10163.24 ; 16800.75,10182.37 ccw(c16813.73,10174.13) 16802.88,10163.24 ; 16800.75,10182.37 16813.45,10202.39 ; 16802.88,10163.24 16812.77,10153.31 ; 16812.77,10153.31 cw(c16809.22,10149.78) 16814.22,10149.87 ; 16812.77,10153.31 cw(c16809.22,10149.78) 16814.22,10149.87 ; 16812.77,10153.31 cw(c16809.22,10149.78) 16814.22,10149.87 ; 16812.77,10153.31 cw(c16809.22,10149.78) 16814.22,10149.87 ; 16812.77,10153.31 cw(c16809.22,10149.78) 16814.22,10149.87 ; 16812.77,10153.31 cw(c16809.22,10149.78) 16814.22,10149.87 ; 16812.77,10153.31 cw(c16809.22,10149.78) 16814.22,10149.87 ; 16812.77,10153.31 cw(c16809.22,10149.78) 16814.22,10149.87 ; 16812.77,10153.31 cw(c16809.22,10149.78) 16814.22,10149.87 ; 16812.77,10153.31 cw(c16809.22,10149.78) 16814.22,10149.87 ; 16812.77,10153.31 cw(c16809.22,10149.78) 16814.22,10149.87 ; 16812.77,10153.31 cw(c16809.22,10149.78) 16814.22,10149.87 ; 16812.77,10153.31 cw(c16809.22,10149.78) 16814.22,10149.87 ; 16812.77,10153.31 cw(c16809.22,10149.78) 16814.22,10149.87 ; 16812.77,10153.31 cw(c16809.22,10149.78) 16814.22,10149.87 ; 16812.77,10153.31 cw(c16809.22,10149.78) 16814.22,10149.87 ; 16813.45,10202.39 ccw(c16809.22,10205.07) 16814.22,10204.98 ; 16813.45,10202.39 ccw(c16809.22,10205.07) 16814.22,10204.98 ; 16813.45,10202.39 ccw(c16809.22,10205.07) 16814.22,10204.98 ; 16813.45,10202.39 ccw(c16809.22,10205.07) 16814.22,10204.98 ; 16813.45,10202.39 ccw(c16809.22,10205.07) 16814.22,10204.98 ; 16814.22,10204.98 16814.22,10297.78 v1(16814.73,10298.28) 16814.73,10340.27 ; 16814.73,10340.27 cw(c16819.73,10340.27) 16816.17,10343.78 ; 16814.73,10340.27 cw(c16819.73,10340.27) 16816.17,10343.78 ; 16814.73,10340.27 cw(c16819.73,10340.27) 16816.17,10343.78 ; 16814.73,10340.27 cw(c16819.73,10340.27) 16816.17,10343.78 ; 16814.73,10340.27 cw(c16819.73,10340.27) 16816.17,10343.78 ; 16814.73,10340.27 cw(c16819.73,10340.27) 16816.17,10343.78 ; 16814.73,10340.27 cw(c16819.73,10340.27) 16816.17,10343.78 ; 16814.73,10340.27 cw(c16819.73,10340.27) 16816.17,10343.78 ; 16814.73,10340.27 cw(c16819.73,10340.27) 16816.17,10343.78 ; 16814.73,10340.27 cw(c16819.73,10340.27) 16816.17,10343.78 ; 16814.73,10340.27 cw(c16819.73,10340.27) 16816.17,10343.78 ; 16814.73,10340.27 cw(c16819.73,10340.27) 16816.17,10343.78 ; 16814.73,10340.27 cw(c16819.73,10340.27) 16816.17,10343.78 ; 16814.73,10340.27 cw(c16819.73,10340.27) 16816.17,10343.78 ; 16814.73,10340.27 cw(c16819.73,10340.27) 16816.17,10343.78 ; 16814.73,10340.27 cw(c16819.73,10340.27) 16816.17,10343.78 ; 16816.17,10343.78 16826.04,10353.65 ; 16826.04,10353.65 ccw(c16815.15,10364.5) 16828.78,10357.37 ; 16826.04,10353.65 ccw(c16815.15,10364.5) 16828.78,10357.37 ; 16826.04,10353.65 ccw(c16815.15,10364.5) 16828.78,10357.37 ; 16826.04,10353.65 ccw(c16815.15,10364.5) 16828.78,10357.37 ; 16826.04,10353.65 ccw(c16815.15,10364.5) 16828.78,10357.37 ; 16826.04,10353.65 ccw(c16815.15,10364.5) 16828.78,10357.37 ; 16826.04,10353.65 ccw(c16815.15,10364.5) 16828.78,10357.37 ; 16826.04,10353.65 ccw(c16815.15,10364.5) 16828.78,10357.37 ; 16826.04,10353.65 ccw(c16815.15,10364.5) 16828.78,10357.37 ; 16826.04,10353.65 ccw(c16815.15,10364.5) 16828.78,10357.37 ; 16826.04,10353.65 ccw(c16815.15,10364.5) 16828.78,10357.37 ; 16826.04,10353.65 ccw(c16815.15,10364.5) 16828.78,10357.37 ; 16826.04,10353.65 ccw(c16815.15,10364.5) 16828.78,10357.37 ; 16826.04,10353.65 ccw(c16815.15,10364.5) 16828.78,10357.37 ; 16826.04,10353.65 ccw(c16815.15,10364.5) 16828.78,10357.37 ; 16826.04,10353.65 ccw(c16815.15,10364.5) 16828.78,10357.37
  Bottom 6+gnd w5: U2.47@16813.98,10236.22 16814.73,10236.97 v1(16814.73,10298.28) ; R67.2@18145.28,11180.61 v1(18179.31,11180.61)
D12: IC1.68 R68.2 U1.48 U2.48 | length 3532
  Top Layer 1 w5: U1.48@16845.47,9775.59 16845.72,9818.09 v1(16845.72,9837.68) ; v1(16900,10388.82) 16900.37,10389.19 16900.37,10465.37 IC1.68@16900.63,10465.63
  Unused w5: v1(16845.72,9837.68) 16847.46,9839.19 cw(c16850.72,9835.4) 16848.4,9839.83 16869.99,9851.25 16870.1,9851.31 cw(c16877.21,9837.68) 16873.96,9852.7 16964.18,9872.24 cw(c16971.7,9837.68) 16966.09,9872.6 17027.49,9882.48 cw(c17034.69,9837.68) 17041.62,9882.52 17123.45,9869.95 ccw(c17131.96,9924.67) 17134.76,9869.37 17184.85,9871.9 ccw(c17182.09,9927.2) 17198.45,9874.31 17308.96,9908.59 ccw(c17294.88,9953.96) 17322.03,9914.98 17878.43,10303.07 cw(c17906.89,10262.58) 17893.14,10310.13 18101.98,10370.55 ccw(c18056.25,10529.09) 18139.27,10386.5 18263.77,10459.15 ccw(c18180.42,10601.98) 18323.86,10519.68 18355.4,10574.61 ccw(c18307.4,10602.23) 18361.23,10615.22 18351.48,10655.59 ccw(c18297.66,10642.59) 18351.26,10656.5 18341.04,10695.75 ccw(c18287.45,10681.8) 18339.77,10699.92 18269.56,10904.95 cw(c18338.58,10928.53) 18267.51,10912.15 v1(18196.42,11220.71)
  Layer 3 w5: v1(16845.72,9837.68) 16845.72,10149.83 ; v1(16900,10388.82) 16846.67,10335.49 ; 16833.71,10184.32 ccw(c16845.23,10174.13) 16834.36,10163.26 ; 16833.71,10184.32 ccw(c16845.23,10174.13) 16834.36,10163.26 ; 16833.71,10184.32 ccw(c16845.23,10174.13) 16834.36,10163.26 ; 16833.71,10184.32 ccw(c16845.23,10174.13) 16834.36,10163.26 ; 16833.71,10184.32 ccw(c16845.23,10174.13) 16834.35,10163.26 ; 16833.71,10184.32 ccw(c16845.23,10174.13) 16834.35,10163.26 ; 16833.71,10184.32 16844.46,10196.48 ; 16834.36,10163.26 16844.25,10153.36 ; 16844.25,10153.36 cw(c16840.72,10149.83) 16845.72,10149.86 ; 16844.25,10153.36 cw(c16840.72,10149.83) 16845.72,10149.86 ; 16844.25,10153.36 cw(c16840.72,10149.83) 16845.72,10149.86 ; 16844.25,10153.36 cw(c16840.72,10149.83) 16845.72,10149.86 ; 16844.25,10153.36 cw(c16840.72,10149.83) 16845.72,10149.86 ; 16844.25,10153.36 cw(c16840.72,10149.83) 16845.72,10149.86 ; 16844.25,10153.36 cw(c16840.72,10149.83) 16845.72,10149.86 ; 16844.25,10153.36 cw(c16840.72,10149.83) 16845.72,10149.86 ; 16844.25,10153.36 cw(c16840.72,10149.83) 16845.72,10149.86 ; 16844.25,10153.36 cw(c16840.72,10149.83) 16845.72,10149.86 ; 16844.25,10153.36 cw(c16840.72,10149.83) 16845.72,10149.86 ; 16844.25,10153.36 cw(c16840.72,10149.83) 16845.72,10149.86 ; 16844.25,10153.36 cw(c16840.72,10149.83) 16845.72,10149.86 ; 16844.25,10153.36 cw(c16840.72,10149.83) 16845.72,10149.86 ; 16844.25,10153.36 cw(c16840.72,10149.83) 16845.72,10149.86 ; 16844.25,10153.36 cw(c16840.72,10149.83) 16845.72,10149.86 ; 16844.46,10196.48 ccw(c16840.72,10199.79) 16845.72,10199.7 ; 16844.46,10196.48 ccw(c16840.72,10199.79) 16845.72,10199.7 ; 16844.46,10196.48 ccw(c16840.72,10199.79) 16845.72,10199.7 ; 16844.46,10196.48 ccw(c16840.72,10199.79) 16845.72,10199.7 ; 16844.46,10196.48 ccw(c16840.72,10199.79) 16845.72,10199.7 ; 16844.46,10196.48 ccw(c16840.72,10199.79) 16845.72,10199.7 ; 16844.46,10196.48 ccw(c16840.72,10199.79) 16845.72,10199.7 ; 16844.46,10196.48 ccw(c16840.72,10199.79) 16845.72,10199.7 ; 16844.46,10196.48 ccw(c16840.72,10199.79) 16845.72,10199.7 ; 16844.46,10196.48 ccw(c16840.72,10199.79) 16845.72,10199.7 ; 16844.46,10196.48 ccw(c16840.72,10199.79) 16845.72,10199.7 ; 16844.46,10196.48 ccw(c16840.72,10199.79) 16845.72,10199.7 ; 16844.46,10196.48 ccw(c16840.72,10199.79) 16845.72,10199.7 ; 16844.46,10196.48 ccw(c16840.72,10199.79) 16845.72,10199.7 ; 16844.46,10196.48 ccw(c16840.72,10199.79) 16845.72,10199.7 ; 16844.46,10196.48 ccw(c16840.72,10199.79) 16845.72,10199.7 ; 16845.23,10331.97 cw(c16850.23,10331.97) 16846.67,10335.49 ; 16845.23,10331.97 cw(c16850.23,10331.97) 16846.67,10335.49 ; 16845.23,10331.97 cw(c16850.23,10331.97) 16846.67,10335.49 ; 16845.23,10331.97 cw(c16850.23,10331.97) 16846.67,10335.49 ; 16845.23,10331.97 cw(c16850.23,10331.97) 16846.67,10335.49 ; 16845.23,10331.97 cw(c16850.23,10331.97) 16846.67,10335.49 ; 16845.23,10331.97 cw(c16850.23,10331.97) 16846.67,10335.49 ; 16845.23,10331.97 cw(c16850.23,10331.97) 16846.67,10335.49 ; 16845.23,10331.97 cw(c16850.23,10331.97) 16846.67,10335.49 ; 16845.23,10331.97 cw(c16850.23,10331.97) 16846.67,10335.49 ; 16845.23,10331.97 cw(c16850.23,10331.97) 16846.67,10335.49 ; 16845.23,10331.97 cw(c16850.23,10331.97) 16846.67,10335.49 ; 16845.23,10331.97 cw(c16850.23,10331.97) 16846.67,10335.49 ; 16845.23,10331.97 cw(c16850.23,10331.97) 16846.67,10335.49 ; 16845.23,10331.97 cw(c16850.23,10331.97) 16846.67,10335.49 ; 16845.23,10331.97 cw(c16850.23,10331.97) 16846.67,10335.49 ; 16845.23,10331.97 16845.23,10298.31 v1(16845.48,10298.06) 16845.72,10297.82 16845.72,10199.7
  Bottom 6+gnd w5: U2.48@16845.47,10236.22 v1(16845.48,10298.06) ; R68.2@18144.17,11220.81 18145.27,11220.8 18157.54,11220.71 v1(18196.42,11220.71)
D13: IC1.77 R69.2 U1.50 U2.50 | length 3878.8
  Top Layer 1 w5: U1.50@16908.71,9775.83 16908.71,9818.09 v1(16908.71,9837.68) ; v1(16924.56,10626.89) 16958.5,10626.89 16962.32,10623.07 IC1.77@17057.76,10623.07
  Unused w5: v1(16908.71,9837.68) 16910.26,9839.16 cw(c16913.71,9835.53) 16911.39,9839.96 16933.12,9851.32 cw(c16940.21,9837.68) 16935.33,9852.25 16963.65,9861.74 cw(c16971.7,9837.68) 16967.7,9862.73 17029.08,9872.6 cw(c17034.69,9837.68) 17040.13,9872.63 17121.95,9860.07 ccw(c17131.96,9924.67) 17135.26,9859.38 17185.35,9861.91 ccw(c17182.09,9927.2) 17201.42,9864.75 17311.92,9899.04 ccw(c17294.88,9953.96) 17327.75,9906.78 17884.14,10294.87 cw(c17906.89,10262.58) 17895.91,10300.52 18104.8,10360.96 ccw(c18056.25,10529.09) 18144.31,10377.86 18268.81,10450.52 ccw(c18180.42,10601.98) 18332.5,10514.66 18364.07,10569.63 ccw(c18307.4,10602.23) 18370.95,10617.57 18361.22,10657.89 ccw(c18297.66,10642.59) 18360.93,10659.04 18350.71,10698.27 ccw(c18287.45,10681.8) 18349.24,10703.14 18279.03,10908.16 cw(c18338.58,10928.53) 18277.02,10915.44 18211.47,11223.83 ccw(c18196.42,11220.71) 18210.87,11225.96 v1(18196.42,11265.71)
  Layer 3 w5: 16897.32,10163.29 cw(c16908.22,10174.13) 16896.7,10184.31 16907.46,10196.48 ; 16897.33,10163.28 16907.25,10153.31 ; v1(16908.71,9837.68) 16908.71,10149.87 ; v1(16924.56,10626.89) 16928.55,10602.04 ; 16928.55,10602 16932.82,10574.16 ; 16932.46,10516.87 16930.37,10358.62 ; 16932.46,10516.89 16933.11,10570 ; 16907.25,10153.31 cw(c16903.71,10149.78) 16908.71,10149.87 ; 16907.25,10153.31 cw(c16903.71,10149.78) 16908.71,10149.87 ; 16907.25,10153.31 cw(c16903.71,10149.78) 16908.71,10149.87 ; 16907.25,10153.31 cw(c16903.71,10149.78) 16908.71,10149.87 ; 16907.25,10153.31 cw(c16903.71,10149.78) 16908.71,10149.87 ; 16907.25,10153.31 cw(c16903.71,10149.78) 16908.71,10149.87 ; 16907.25,10153.31 cw(c16903.71,10149.78) 16908.71,10149.87 ; 16907.25,10153.31 cw(c16903.71,10149.78) 16908.71,10149.87 ; 16907.25,10153.31 cw(c16903.71,10149.78) 16908.71,10149.87 ; 16907.25,10153.31 cw(c16903.71,10149.78) 16908.71,10149.87 ; 16907.25,10153.31 cw(c16903.71,10149.78) 16908.71,10149.87 ; 16907.25,10153.31 cw(c16903.71,10149.78) 16908.71,10149.87 ; 16907.25,10153.31 cw(c16903.71,10149.78) 16908.71,10149.87 ; 16907.25,10153.31 cw(c16903.71,10149.78) 16908.71,10149.87 ; 16907.25,10153.31 cw(c16903.71,10149.78) 16908.71,10149.87 ; 16907.25,10153.31 cw(c16903.71,10149.78) 16908.71,10149.87 ; 16907.46,10196.48 ccw(c16903.71,10199.79) 16908.71,10199.7 ; 16907.46,10196.48 ccw(c16903.71,10199.79) 16908.71,10199.7 ; 16907.46,10196.48 ccw(c16903.71,10199.79) 16908.71,10199.7 ; 16907.46,10196.48 ccw(c16903.71,10199.79) 16908.71,10199.7 ; 16907.46,10196.48 ccw(c16903.71,10199.79) 16908.71,10199.7 ; 16907.46,10196.48 ccw(c16903.71,10199.79) 16908.71,10199.7 ; 16907.46,10196.48 ccw(c16903.71,10199.79) 16908.71,10199.7 ; 16907.46,10196.48 ccw(c16903.71,10199.79) 16908.71,10199.7 ; 16907.46,10196.48 ccw(c16903.71,10199.79) 16908.71,10199.7 ; 16907.46,10196.48 ccw(c16903.71,10199.79) 16908.71,10199.7 ; 16907.46,10196.48 ccw(c16903.71,10199.79) 16908.71,10199.7 ; 16907.46,10196.48 ccw(c16903.71,10199.79) 16908.71,10199.7 ; 16907.46,10196.48 ccw(c16903.71,10199.79) 16908.71,10199.7 ; 16907.46,10196.48 ccw(c16903.71,10199.79) 16908.71,10199.7 ; 16907.46,10196.48 ccw(c16903.71,10199.79) 16908.71,10199.7 ; 16907.46,10196.48 ccw(c16903.71,10199.79) 16908.71,10199.7 ; 16908.22,10319.97 cw(c16913.22,10319.97) 16909.09,10322.78 ; 16908.22,10319.97 cw(c16913.22,10319.97) 16909.09,10322.78 ; 16908.22,10319.97 cw(c16913.22,10319.97) 16909.09,10322.78 ; 16908.22,10319.97 cw(c16913.22,10319.97) 16909.09,10322.78 ; 16908.22,10319.97 cw(c16913.22,10319.97) 16909.09,10322.78 ; 16908.22,10319.97 cw(c16913.22,10319.97) 16909.09,10322.78 ; 16908.22,10319.97 cw(c16913.22,10319.97) 16909.09,10322.78 ; 16908.22,10319.97 cw(c16913.22,10319.97) 16909.09,10322.78 ; 16908.22,10319.97 cw(c16913.22,10319.97) 16909.09,10322.78 ; 16908.22,10319.97 cw(c16913.22,10319.97) 16909.09,10322.78 ; 16908.22,10319.97 cw(c16913.22,10319.97) 16909.09,10322.78 ; 16908.22,10319.97 cw(c16913.22,10319.97) 16909.09,10322.78 ; 16908.22,10319.97 cw(c16913.22,10319.97) 16909.09,10322.78 ; 16908.22,10319.97 cw(c16913.22,10319.97) 16909.09,10322.78 ; 16908.22,10319.97 cw(c16913.22,10319.97) 16909.09,10322.78 ; 16908.22,10319.97 cw(c16913.22,10319.97) 16909.09,10322.78 ; 16908.22,10319.97 v1(16908.22,10298.31) 16908.71,10297.82 16908.71,10199.7 ; 16909.09,10322.78 16927.71,10350.17 ; 16927.71,10350.17 ccw(c16915,10358.82) 16930.37,10358.62 ; 16927.71,10350.17 ccw(c16915,10358.82) 16930.37,10358.62 ; 16927.71,10350.17 ccw(c16915,10358.82) 16930.37,10358.62 ; 16927.71,10350.17 ccw(c16915,10358.82) 16930.37,10358.62 ; 16927.71,10350.17 ccw(c16915,10358.82) 16930.37,10358.62 ; 16927.71,10350.17 ccw(c16915,10358.82) 16930.37,10358.62 ; 16927.71,10350.17 ccw(c16915,10358.82) 16930.37,10358.62 ; 16927.71,10350.17 ccw(c16915,10358.82) 16930.37,10358.62 ; 16927.71,10350.17 ccw(c16915,10358.82) 16930.37,10358.62 ; 16927.71,10350.17 ccw(c16915,10358.82) 16930.37,10358.62 ; 16927.71,10350.17 ccw(c16915,10358.82) 16930.37,10358.62 ; 16927.71,10350.17 ccw(c16915,10358.82) 16930.37,10358.62 ; 16927.71,10350.17 ccw(c16915,10358.82) 16930.37,10358.62 ; 16927.71,10350.17 ccw(c16915,10358.82) 16930.37,10358.62 ; 16927.71,10350.17 ccw(c16915,10358.82) 16930.37,10358.62 ; 16927.71,10350.17 ccw(c16915,10358.82) 16930.37,10358.62 ; 16932.82,10574.16 cw(c16907.74,10570.31) 16933.11,10570 ; 16932.82,10574.16 cw(c16907.74,10570.31) 16933.11,10570 ; 16932.82,10574.16 cw(c16907.74,10570.31) 16933.11,10570 ; 16932.82,10574.16 cw(c16907.74,10570.31) 16933.11,10570 ; 16932.82,10574.16 cw(c16907.74,10570.31) 16933.11,10570 ; 16932.82,10574.16 cw(c16907.74,10570.31) 16933.11,10570 ; 16932.82,10574.16 cw(c16907.74,10570.31) 16933.11,10570 ; 16932.82,10574.16 cw(c16907.74,10570.31) 16933.11,10570 ; 16932.82,10574.16 cw(c16907.74,10570.31) 16933.11,10570 ; 16932.82,10574.16 cw(c16907.74,10570.31) 16933.11,10570 ; 16932.82,10574.16 cw(c16907.74,10570.31) 16933.11,10570 ; 16932.82,10574.16 cw(c16907.74,10570.31) 16933.11,10570 ; 16932.82,10574.16 cw(c16907.74,10570.31) 16933.11,10570 ; 16932.82,10574.16 cw(c16907.74,10570.31) 16933.11,10570 ; 16932.82,10574.16 cw(c16907.74,10570.31) 16933.11,10570 ; 16932.82,10574.16 cw(c16907.74,10570.31) 16933.11,10570
  Bottom 6+gnd w5: U2.50@16908.46,10236.22 v1@16908.46,10298.06 ; R69.2@18144.17,11262.13 18189.93,11262.13 18193.51,11265.71 v1(18196.42,11265.71)
D14: IC1.78 R70.2 U1.51 U2.51 | length 3508.4
  Top Layer 1 w5: U1.51@16940.21,9775.83 v1(16940.21,9837.68) ; v1(16964.06,10643.47) 16964.42,10643.11 17031.22,10643.11 17031.22,10643.46 IC1.78@17057.6,10642.6
  Unused w5: v1(16940.21,9837.68) 16941.76,9839.16 cw(c16945.21,9835.53) 16942.89,9839.96 16964.61,9851.31 cw(c16971.7,9837.68) 16969.32,9852.87 17030.67,9862.73 cw(c17034.69,9837.68) 17038.63,9862.74 17120.46,9850.18 ccw(c17131.96,9924.67) 17135.77,9849.39 17185.89,9851.93 ccw(c17182.09,9927.2) 17204.38,9855.2 17314.88,9889.49 ccw(c17294.88,9953.96) 17333.47,9898.57 17889.86,10286.67 cw(c17906.89,10262.58) 17898.69,10290.92 18107.62,10351.36 ccw(c18056.25,10529.09) 18149.35,10369.22 18273.85,10441.88 ccw(c18180.42,10601.98) 18341.18,10509.68 18372.74,10564.65 ccw(c18307.4,10602.23) 18380.67,10619.91 18370.94,10660.23 ccw(c18297.66,10642.59) 18370.61,10661.54 18360.39,10700.79 ccw(c18287.45,10681.8) 18358.72,10706.33 18288.5,10911.38 cw(c18338.58,10928.53) 18286.8,10917.52 18221.25,11225.93 ccw(c18196.42,11220.71) 18221.16,11226.35 18211.41,11269.13 ccw(c18196.42,11265.71) 18210.23,11272.46 v1(18196.42,11300.71)
  Layer 3 w5: v1(16940.21,9837.68) 16940.21,10149.87 ccw(c16935.21,10149.78) 16938.75,10153.31 16928.82,10163.28 cw(c16939.72,10174.13) 16928.19,10184.31 16938.95,10196.48 ccw(c16935.21,10199.79) 16940.21,10199.7 v1(16940.21,10294.41) 16940.21,10315.33 cw(c16945.21,10315.33) 16940.37,10316.61 16949.18,10349.72 ccw(c16915,10358.82) 16950.31,10356.77 16965.88,10625.55 16965.88,10625.6 ccw(c16960.88,10625.81) 16965.86,10626.34 v1@16964.04,10643.46
  Bottom 6+gnd w5: U2.51@16939.96,10236.22 16940.21,10236.47 v1(16940.21,10294.41) ; R70.2@18147.1,11300.71 v1(18196.42,11300.71)
D15: IC1.79 R71.2 U1.53 U2.53 | length 3643.4
  Top Layer 1 w5: v1(16993.84,10685.43) 16993.84,10684.05 17015.29,10662.59 17057.61,10662.59 IC1.79@17057.76,10662.44 ; U1.53@17002.95,9775.59 17003.2,9818.09 v1(17003.2,9837.68)
  Unused w5: v1(17003.2,9837.68) 17004.66,9839.14 cw(c17008.2,9835.6) 17005.89,9840.04 17027.58,9851.31 cw(c17034.69,9837.68) 17037.1,9852.86 17118.98,9840.29 ccw(c17131.96,9924.67) 17136.25,9839.4 17186.4,9841.94 ccw(c17182.09,9927.2) 17207.33,9845.65 17317.85,9879.94 ccw(c17294.88,9953.96) 17339.19,9890.37 17895.58,10278.46 cw(c17906.89,10262.58) 17901.47,10281.31 18110.45,10341.77 ccw(c18056.25,10529.09) 18154.39,10360.59 18278.89,10433.24 ccw(c18180.42,10601.98) 18349.85,10504.7 18381.41,10559.67 ccw(c18307.4,10602.23) 18390.39,10622.26 18380.66,10662.58 ccw(c18297.66,10642.59) 18380.29,10664.05 18370.07,10703.31 ccw(c18287.45,10681.8) 18368.22,10709.46 18297.96,10914.62 cw(c18338.58,10928.53) 18296.59,10919.6 18231.02,11228.06 ccw(c18196.42,11220.71) 18230.91,11228.57 18221.16,11271.35 ccw(c18196.42,11265.71) 18220.73,11272.96 18211.15,11305.1 ccw(c18196.42,11300.71) 18210.87,11305.96 v1(18196.42,11345.71)
  Layer 3 w5: v1(16993.84,10685.43) 17002.7,10499.02 ; v1(17003.2,9837.68) 17003.2,10149.87 ; 17001.74,10153.31 cw(c16998.2,10149.78) 17003.2,10149.87 ; 17001.74,10153.31 cw(c16998.2,10149.78) 17003.2,10149.87 ; 17001.74,10153.31 cw(c16998.2,10149.78) 17003.2,10149.87 ; 17001.74,10153.31 cw(c16998.2,10149.78) 17003.2,10149.87 ; 17001.74,10153.31 cw(c16998.2,10149.78) 17003.2,10149.87 ; 17001.74,10153.31 cw(c16998.2,10149.78) 17003.2,10149.87 ; 17001.74,10153.31 cw(c16998.2,10149.78) 17003.2,10149.87 ; 17001.74,10153.31 cw(c16998.2,10149.78) 17003.2,10149.87 ; 17001.74,10153.31 cw(c16998.2,10149.78) 17003.2,10149.87 ; 17001.74,10153.31 cw(c16998.2,10149.78) 17003.2,10149.87 ; 17001.74,10153.31 cw(c16998.2,10149.78) 17003.2,10149.87 ; 17001.74,10153.31 cw(c16998.2,10149.78) 17003.2,10149.87 ; 17001.74,10153.31 cw(c16998.2,10149.78) 17003.2,10149.87 ; 17001.74,10153.31 cw(c16998.2,10149.78) 17003.2,10149.87 ; 17001.74,10153.31 cw(c16998.2,10149.78) 17003.2,10149.87 ; 17001.74,10153.31 cw(c16998.2,10149.78) 17003.2,10149.87 ; 17001.74,10153.31 16991.81,10163.28 cw(c17002.71,10174.13) 16991.19,10184.31 17001.94,10196.48 ; 17001.94,10196.48 ccw(c16998.2,10199.79) 17003.2,10199.7 ; 17001.94,10196.48 ccw(c16998.2,10199.79) 17003.2,10199.7 ; 17001.94,10196.48 ccw(c16998.2,10199.79) 17003.2,10199.7 ; 17001.94,10196.48 ccw(c16998.2,10199.79) 17003.2,10199.7 ; 17001.94,10196.48 ccw(c16998.2,10199.79) 17003.2,10199.7 ; 17001.94,10196.48 ccw(c16998.2,10199.79) 17003.2,10199.7 ; 17001.94,10196.48 ccw(c16998.2,10199.79) 17003.2,10199.7 ; 17001.94,10196.48 ccw(c16998.2,10199.79) 17003.2,10199.7 ; 17001.94,10196.48 ccw(c16998.2,10199.79) 17003.2,10199.7 ; 17001.94,10196.48 ccw(c16998.2,10199.79) 17003.2,10199.7 ; 17001.94,10196.48 ccw(c16998.2,10199.79) 17003.2,10199.7 ; 17001.94,10196.48 ccw(c16998.2,10199.79) 17003.2,10199.7 ; 17001.94,10196.48 ccw(c16998.2,10199.79) 17003.2,10199.7 ; 17001.94,10196.48 ccw(c16998.2,10199.79) 17003.2,10199.7 ; 17001.94,10196.48 ccw(c16998.2,10199.79) 17003.2,10199.7 ; 17001.94,10196.48 ccw(c16998.2,10199.79) 17003.2,10199.7 ; 17002.71,10498.88 ccw(c16997.71,10498.79) 17002.7,10499.02 ; 17002.71,10498.88 ccw(c16997.71,10498.79) 17002.7,10499.02 ; 17002.71,10498.88 ccw(c16997.71,10498.79) 17002.7,10499.02 ; 17002.71,10498.88 ccw(c16997.71,10498.79) 17002.7,10499.02 ; 17002.71,10498.88 ccw(c16997.71,10498.79) 17002.7,10499.02 ; 17002.71,10498.88 v1(17002.71,10298.31) 17003.2,10297.82 17003.2,10199.7
  Bottom 6+gnd w5: U2.53@17002.95,10236.22 v1@17002.95,10298.06 ; R71.2@18145.11,11345.71 v1(18196.42,11345.71)
DD0: IC2.85 U3.2 U4.2 | length 1485.8
  Top Layer 1 w5: v1@15676.86,10776.36 IC2.85@15749.52,10776.36 ; v1@15694.65,10170.19 U3.2@15694.65,10232.03
  Layer 3 w5: v1(15676.78,10776.28) 15681.76,10798.95 cw(c15696.78,10795.65) 15708.87,10805.15 15817.03,10667.36 cw(c15804.94,10657.87) 15817.74,10649.35 15710.64,10488.43 ccw(c15714.8,10485.66) 15709.8,10485.66 15709.8,10196.31 ; v1(15694.41,9709.31) 15694.41,9803 15710.53,9819.12 15710.53,10145.78 ; 15709.8,10196.27 cw(c15704.8,10196.36) 15708.98,10193.61 15695.23,10172.69 ccw(c15699.41,10169.94) 15694.41,10170 v1(15694.41,10169.94) ccw(c15699.41,10169.94) 15695.46,10166.87 15709.48,10148.8 ; 15709.48,10148.8 cw(c15705.53,10145.74) 15710.53,10145.83 ; 15709.48,10148.8 cw(c15705.53,10145.74) 15710.53,10145.83 ; 15709.48,10148.8 cw(c15705.53,10145.74) 15710.53,10145.83 ; 15709.48,10148.8 cw(c15705.53,10145.74) 15710.53,10145.83 ; 15709.48,10148.8 cw(c15705.53,10145.74) 15710.53,10145.83 ; 15709.48,10148.8 cw(c15705.53,10145.74) 15710.53,10145.83 ; 15709.48,10148.8 cw(c15705.53,10145.74) 15710.53,10145.83 ; 15709.48,10148.8 cw(c15705.53,10145.74) 15710.53,10145.83 ; 15709.48,10148.8 cw(c15705.53,10145.74) 15710.53,10145.83 ; 15709.48,10148.8 cw(c15705.53,10145.74) 15710.53,10145.83 ; 15709.48,10148.8 cw(c15705.53,10145.74) 15710.53,10145.83 ; 15709.48,10148.8 cw(c15705.53,10145.74) 15710.53,10145.83 ; 15709.48,10148.8 cw(c15705.53,10145.74) 15710.53,10145.83 ; 15709.48,10148.8 cw(c15705.53,10145.74) 15710.53,10145.83 ; 15709.48,10148.8 cw(c15705.53,10145.74) 15710.53,10145.83 ; 15709.48,10148.8 cw(c15705.53,10145.74) 15710.53,10145.83
  Bottom 6+gnd w5: v1@15694.65,9709.56 U4.2@15694.65,9771.4